# Altium PCB HDR-TH_6P-P2.54-V-M.pcbdoc
Units mm, origin at the board's own origin, x right, y up, seen from the top; angles counter-clockwise.
Board outline 43.32 x 28.51 mm, 2 copper layers (Top Layer, Bottom Layer); 1 components, 0 nets, 6 pads, 0 vias.
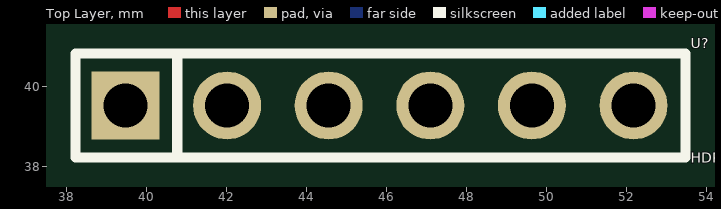
[diagram p0: Top Layer view]
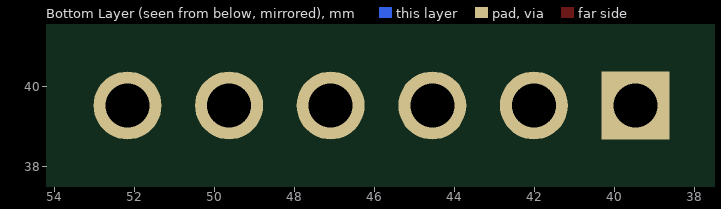
[diagram p1: Bottom Layer view, seen from below]

## Layer stack, top to bottom
Top Layer: signal copper (thickness not stored)
Dielectric: dielectric 0.32, FR-4, Dk 4.8
Bottom Layer: signal copper (thickness not stored)

## Board outline
68.717,25.4 25.4,25.4 25.4,53.908 68.717,53.908

## Components (designator, comment, footprint, x,y, rotation, side; value= is the part's Value field where it differs from the comment)
U? "HDR-TH_6P-P2.54-V-M" HDR-TH_6P-P2.54-V-M 45.852,39.527 r0 top

## Footprints (in the part's own frame and the unit in brackets; to place one, negate y for a bottom-side part, rotate by r counter-clockwise, add the part's x,y. Pads: shape width x height; smd on the part's side, far side on the other; paste and mask are expansions set on the pad)
HDR-TH_6P-P2.54-V-M [mm]
  rect 1.7x1.7 hole 1.1 paste+0.102 mask+0.051: 1(-6.375,0)
  round 1.7 hole 1.1 paste+0.102 mask+0.051: 2(-3.835,0) 3(-1.295,0) 4(1.245,0) 5(3.785,0) 6(6.325,0)
  silkscreen extent -7.62,-1.3 7.62,1.3

## Nets (pads, with @x,y where several pads share a name; then routed paths per layer and width w, separated by ;. In a path a pad name is that pad's centre, name@x,y a point inside that pad or via, vN(x,y) a via of type N, cw(c..) or ccw(c..) an arc to the next point about the centre after c; other vN are vias at no path point)
pads on no net: U?.1 U?.2 U?.3 U?.4 U?.5 U?.6

## Silkscreen, mask and mechanical layers (free items; w line width, h text height)
Document:
  lines w0.003: 47.058,39.654 47.059,39.654